# Altium PCB PANEL-PCB-Rectifier.PcbDoc
Units mm, origin at the board's own origin, x right, y up, seen from the top; angles counter-clockwise.
Board outline 300 x 182 mm, 2 copper layers (Top Layer, Bottom Layer), stack 1.569 mm thick; 8 components, 4 nets, 8 pads, 0 vias.
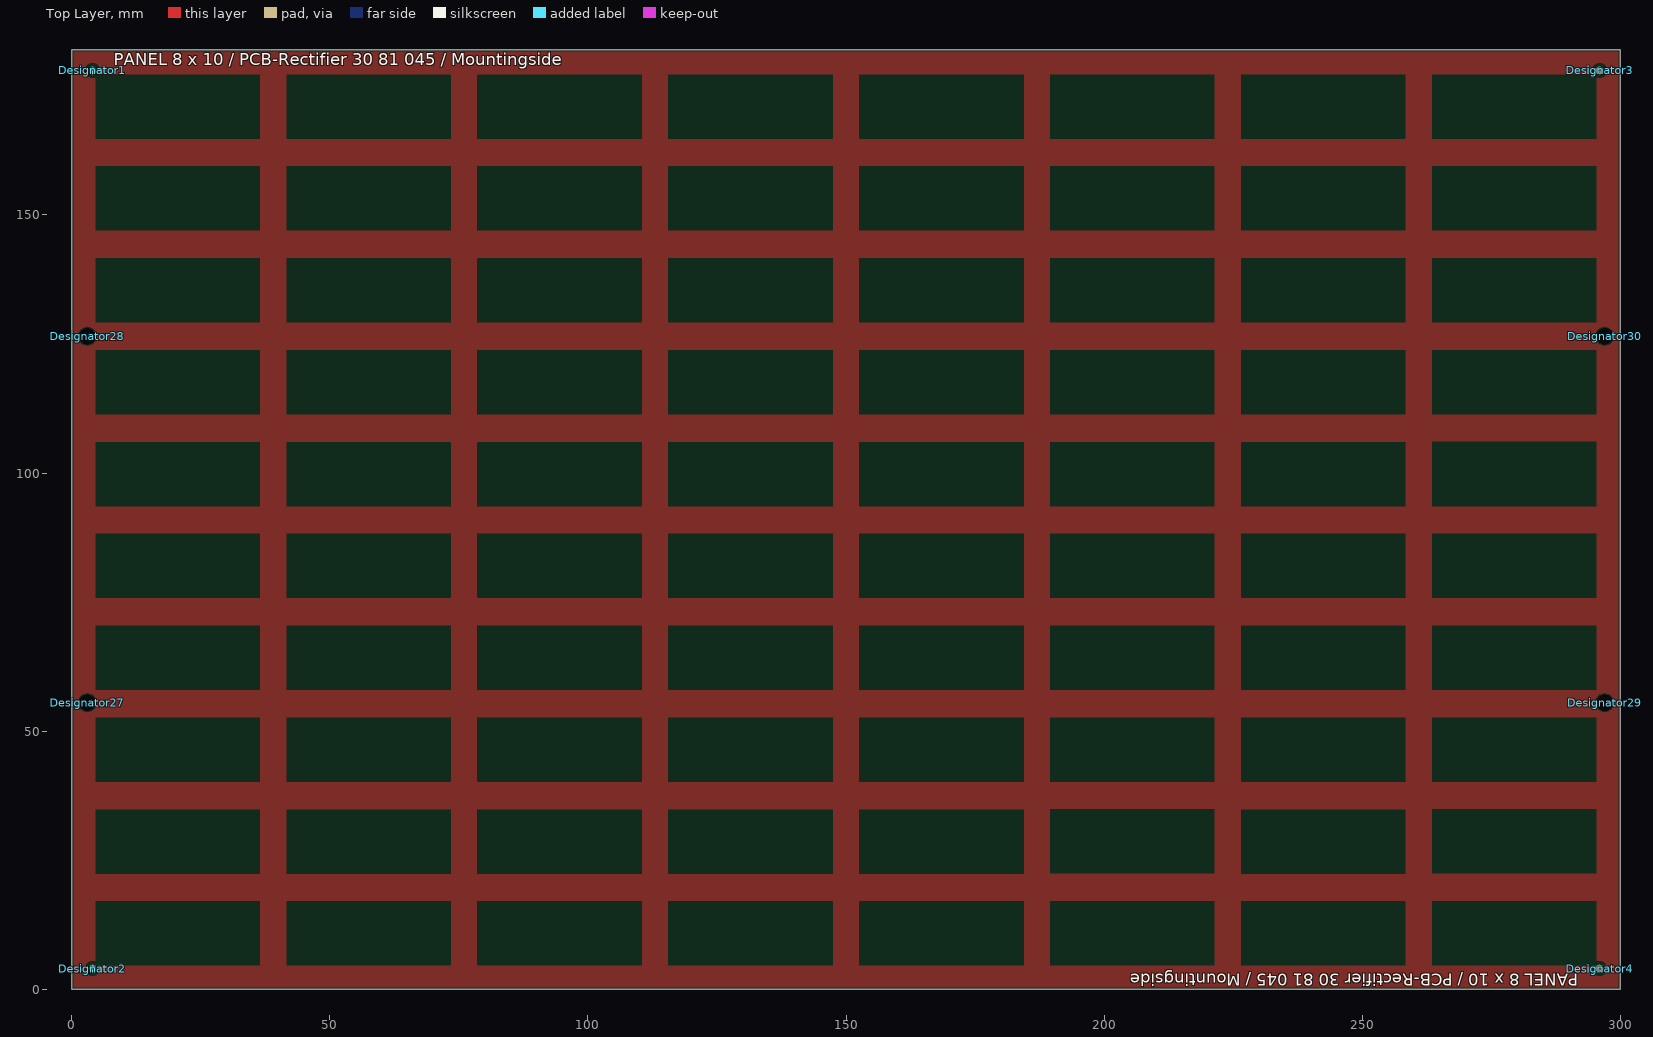
[diagram p0: Top Layer view]
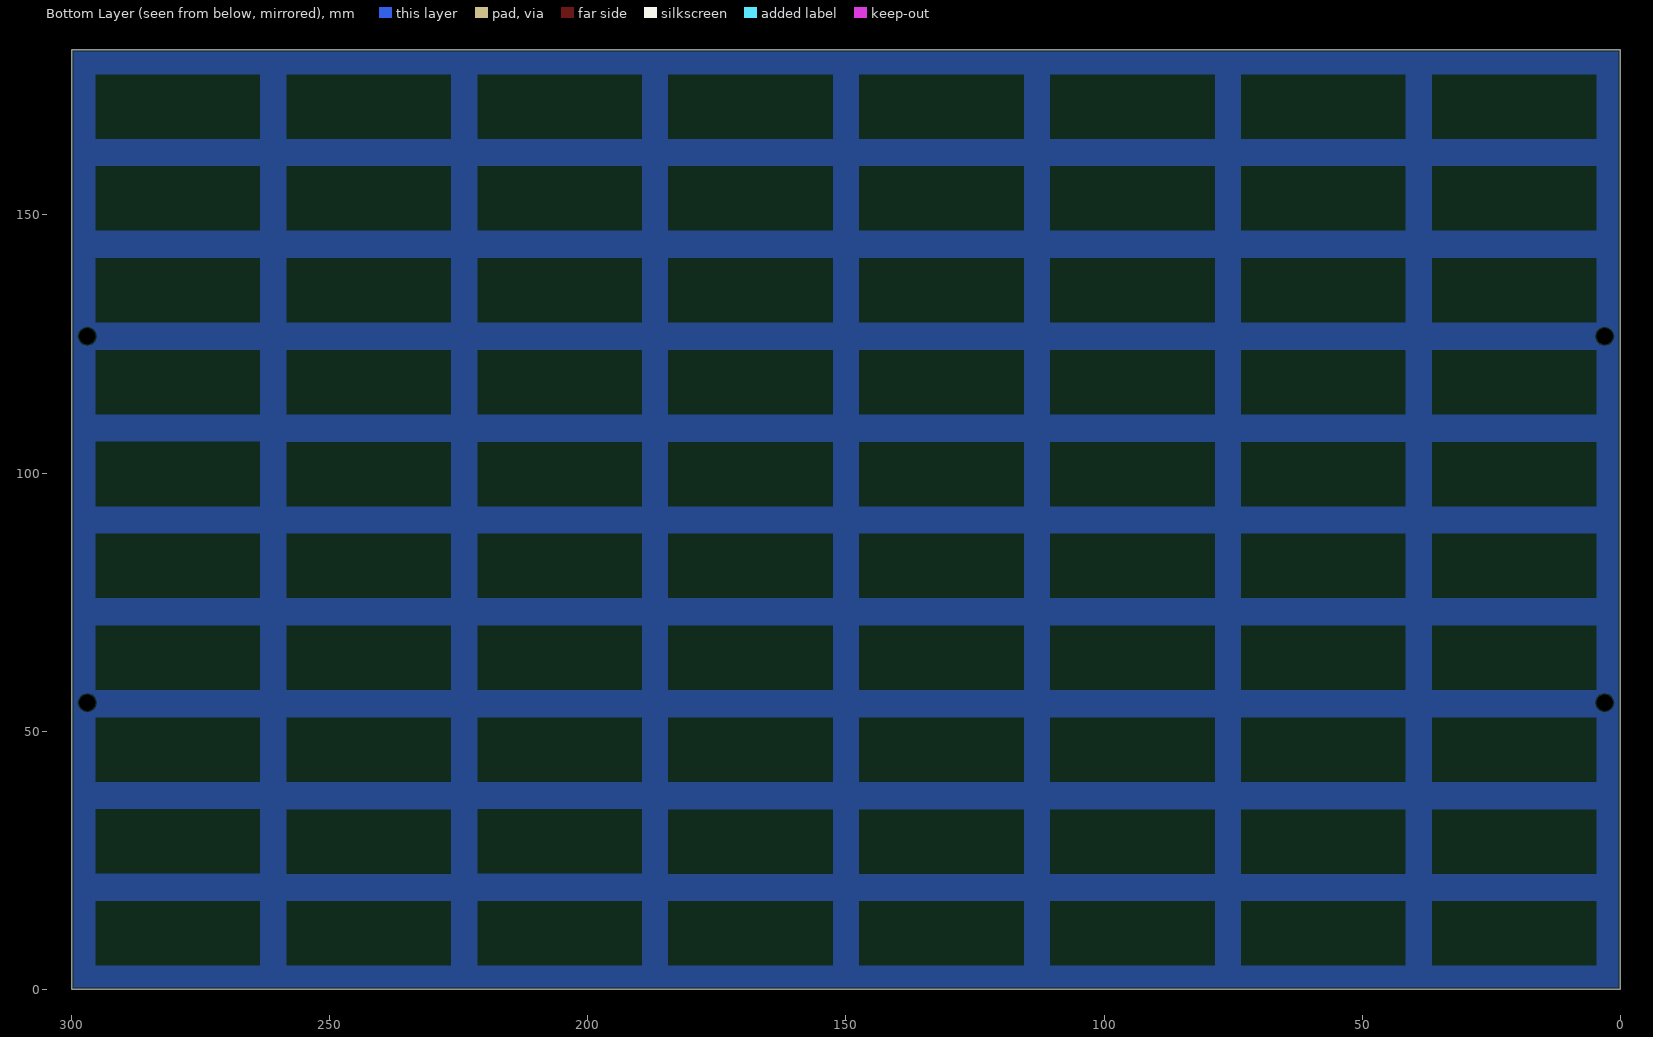
[diagram p1: Bottom Layer view, seen from below]

## Layer stack, top to bottom
Top Solder: solder mask 0.0254, SM-001, Dk 4
Top Layer: signal copper 0.035
Dielectric 1: core 1.4986, Core-043, Dk 4.3
Bottom Layer: signal copper 0.035
Bottom Solder: solder mask 0.0254, SM-001, Dk 4

## Board outline
0,0 0,182 300,182 300,0
cut-out: 6.9,193

## Design rules (kind name [scope] priority, off if disabled: settings)
BoardOutlineClearance [All] p1: gap=0.4 ignorepadtopadclearanceinfootprint=FALSE
Clearance [All] p1: gap=0.2 ignorepadtopadclearanceinfootprint=FALSE except(0: Arc-Hole Track-Hole SMDPad-Hole THPad-Hole Via-Hole Fill-Hole Poly-Hole Region-Hole Text-Hole)
HoleSize [All] p1: absolutevalues=TRUE maxlimit=4 minlimit=0.025 maxpercent=80.000 minpercent=20.000
HoleToHoleClearance [All] p1: gap=0.1 allowstackedmicrovias=TRUE
MinimumSolderMaskSliver [All] p1: minsoldermaskwidth=0.07
PolygonConnect [All] p1: connectstyle=Direct reliefconductorwidth=0.3 reliefentries=4 polygonreliefangle="90 Angle" airgapwidth=0.3
RoutingVias [All] p1: holewidth=0.2 width=0.6 viastyle="Through Hole" minholewidth=0.3 minwidth=0.6 maxholewidth=5 maxwidth=10
SilkToSilkClearance [All] p1: silktosilkclearance=0.1
SilkToSolderMaskClearance [IsPad] p1: minsilkscreentomaskgap=0.1 clearancetoexposedcopper=TRUE
SolderMaskExpansion [All] p1: expansion=0.06 istentingtop=FALSE
Width [All] p1: maxlimit=10 minlimit=0.2 preferedwidth=0.3
25 further rules are at their usual default settings.

## Components (designator, comment, footprint, x,y, rotation, side; value= is the part's Value field where it differs from the comment)
Designator1 "Comment" Fiducial_1 4,178 r0 top
Designator2 "Comment" Fiducial_1 4,4 r0 top
Designator3 "Comment" Fiducial_1 296,178 r0 top
Designator4 "Comment" Fiducial_1 296,4 r0 top
Designator27 "Comment" Mountingholes_M3_NotPlated 3,55.5 r0 top locked
Designator28 "Comment" Mountingholes_M3_NotPlated 3,126.5 r0 top locked
Designator29 "Comment" Mountingholes_M3_NotPlated 297,55.5 r0 top locked
Designator30 "Comment" Mountingholes_M3_NotPlated 297,126.5 r0 top locked

## Footprints (in the part's own frame and the unit in brackets; to place one, negate y for a bottom-side part, rotate by r counter-clockwise, add the part's x,y. Pads: shape width x height; smd on the part's side, far side on the other; paste and mask are expansions set on the pad)
Fiducial_1 [mm] "d=1.5mm"
  round 1.5 smd paste-5 mask+0.75: 2(0,0)
  Top Layer pour cut-out: 1.5,0 1.386,0.574 1.061,1.061 0.574,1.386 0,1.5 0,1.5 -0.574,1.386 -1.061,1.061 -1.386,0.574 -1.5,0 -1.5,0 -1.386,-0.574 -1.061,-1.061 -0.574,-1.386 0,-1.5 0,-1.5 0.574,-1.386 1.061,-1.061 1.386,-0.574 1.5,0
Mountingholes_M3_NotPlated [mm] "M3"
  round 0 hole 3.2 unplated: 1(0,0)

## Nets (pads, with @x,y where several pads share a name; then routed paths per layer and width w, separated by ;. In a path a pad name is that pad's centre, name@x,y a point inside that pad or via, vN(x,y) a via of type N, cw(c..) or ccw(c..) an arc to the next point about the centre after c; other vN are vias at no path point)
NetD1_1: 
NetD1_2: 
NetD2_2: 
NetD3_2: 
pads on no net: Designator1.2 Designator2.2 Designator3.2 Designator4.2 Designator27.1 Designator28.1 Designator29.1 Designator30.1

## Polygon pours and split planes (outlines as drawn)
no net on Top Milling "NONET_L03_P-001" (solid): 12.8,-1.7
no net on Top Milling "NONET_L03_P-001" (solid): 25.875,-3
no net on Top Milling "NONET_L03_P-001" (solid): 14.7,-3
no net on Mechanical 16 "NONET_L03_P-001" (solid): 76.3,22.3
NetD1_1 on Top Layer "NONET_L03_P-001" (solid, pour order 26): 295,0 295,182 300,182 300,0
NetD1_1 on Top Layer "NONET_L03_P-001" (solid, pour order 25): 258,-0.004 258,181.996 264,181.996 264,-0.004
NetD1_1 on Top Layer "NONET_L03_P-001" (solid, pour order 24): 221,-0.004 221,181.996 227,181.996 227,-0.004
NetD1_1 on Top Layer "NONET_L03_P-001" (solid, pour order 23): 184,0 184,182 190,182 190,0
NetD1_1 on Top Layer "NONET_L03_P-001" (solid, pour order 22): 147,0 147,182 153,182 153,0
NetD1_1 on Top Layer "NONET_L03_P-001" (solid, pour order 21): 110,0 110,182 116,182 116,0
NetD1_1 on Top Layer "NONET_L03_P-001" (solid, pour order 20): 73,0 73,182 79,182 79,0
NetD1_1 on Top Layer "NONET_L03_P-001" (solid, pour order 19): 36,0.004 36,182.004 42,182.004 42,0.004
NetD1_1 on Top Layer "NONET_L03_P-001" (solid, pour order 18): 0,0 0,182 5,182 5,0
NetD1_1 on Top Layer "NONET_L03_P-001" (solid, pour order 17): 0,182 300,182 300,176.8 0,176.8
NetD1_1 on Top Layer "NONET_L03_P-001" (solid, pour order 16): 0,165.2 300,165.2 300,159 0,159
NetD1_1 on Top Layer "NONET_L03_P-001" (solid, pour order 15): 0,147.4 300,147.4 300,141.2 0,141.2
NetD1_1 on Top Layer "NONET_L03_P-001" (solid, pour order 14): 0,129.6 300,129.6 300,123.4 0,123.4
NetD1_1 on Top Layer "NONET_L03_P-001" (solid, pour order 13): 0,111.8 300,111.8 300,105.6 0,105.6
NetD1_1 on Top Layer "NONET_L03_P-001" (solid, pour order 12): 0,94 300,94 300,87.8 0,87.8
NetD1_1 on Top Layer "NONET_L03_P-001" (solid, pour order 11): 0,76.2 300,76.2 300,70 0,70
NetD1_1 on Top Layer "NONET_L03_P-001" (solid, pour order 10): 0,58.4 300,58.4 300,52.2 0,52.2
NetD1_1 on Top Layer "NONET_L03_P-001" (solid, pour order 9): 0,40.6 300,40.6 300,34.4 0,34.4
NetD1_1 on Top Layer "NONET_L03_P-001" (solid, pour order 8): 0,22.8 300,22.8 300,16.6 0,16.6
NetD1_1 on Top Layer "NONET_L03_P-001" (solid, pour order 7): 0,5 300,5 300,0 0,0
NetD1_2 on Bottom Layer "NONET_L03_P-001" (solid, pour order 46): 295,0 295,182 300,182 300,0
NetD1_2 on Bottom Layer "NONET_L03_P-001" (solid, pour order 27): 0,5 300,5 300,0 0,0
NetD1_2 on Bottom Layer "NONET_L03_P-001" (solid, pour order 28): 0,22.8 300,22.8 300,16.6 0,16.6
NetD1_2 on Bottom Layer "NONET_L03_P-001" (solid, pour order 29): 0,40.6 300,40.6 300,34.4 0,34.4
NetD1_2 on Bottom Layer "NONET_L03_P-001" (solid, pour order 30): 0,58.4 300,58.4 300,52.2 0,52.2
NetD1_2 on Bottom Layer "NONET_L03_P-001" (solid, pour order 31): 0,76.2 300,76.2 300,70 0,70
NetD1_2 on Bottom Layer "NONET_L03_P-001" (solid, pour order 32): 0,94 300,94 300,87.8 0,87.8
NetD1_2 on Bottom Layer "NONET_L03_P-001" (solid, pour order 33): 0,111.8 300,111.8 300,105.6 0,105.6
NetD1_2 on Bottom Layer "NONET_L03_P-001" (solid, pour order 34): 0,129.6 300,129.6 300,123.4 0,123.4
NetD1_2 on Bottom Layer "NONET_L03_P-001" (solid, pour order 35): 0,147.4 300,147.4 300,141.2 0,141.2
NetD1_2 on Bottom Layer "NONET_L03_P-001" (solid, pour order 36): 0,165.2 300,165.2 300,159 0,159
NetD1_2 on Bottom Layer "NONET_L03_P-001" (solid, pour order 37): 0,182 300,182 300,176.8 0,176.8
NetD1_2 on Bottom Layer "NONET_L03_P-001" (solid, pour order 38): 0,0 0,182 5,182 5,0
NetD1_2 on Bottom Layer "NONET_L03_P-001" (solid, pour order 39): 36,0.004 36,182.004 42,182.004 42,0.004
NetD1_2 on Bottom Layer "NONET_L03_P-001" (solid, pour order 40): 73,0 73,182 79,182 79,0
NetD1_2 on Bottom Layer "NONET_L03_P-001" (solid, pour order 41): 110,0 110,182 116,182 116,0
NetD1_2 on Bottom Layer "NONET_L03_P-001" (solid, pour order 42): 147,0 147,182 153,182 153,0
NetD1_2 on Bottom Layer "NONET_L03_P-001" (solid, pour order 43): 184,0 184,182 190,182 190,0
NetD1_2 on Bottom Layer "NONET_L03_P-001" (solid, pour order 44): 221,-0.004 221,181.996 227,181.996 227,-0.004
NetD1_2 on Bottom Layer "NONET_L03_P-001" (solid, pour order 45): 258,-0.004 258,181.996 264,181.996 264,-0.004

## Other copper
Top Layer:
  pour cut-out: 78.5,88.3 78.5,75.7 110.5,75.7 110.5,88.3
  pour cut-out: 78.5,123.9 78.5,111.3 110.5,111.3 110.5,123.9
  pour cut-out: 78.5,17.1 78.5,4.5 110.5,4.5 110.5,17.1
  pour cut-out: 78.5,52.7 78.5,40.1 110.5,40.1 110.5,52.7
  pour cut-out: 78.5,159.5 78.5,146.9 110.5,146.9 110.5,159.5
  pour cut-out: 78.5,177.3 78.5,164.7 110.5,164.7 110.5,177.3
  pour cut-out: 78.5,141.7 78.5,129.1 110.5,129.1 110.5,141.7
  pour cut-out: 78.5,106.1 78.5,93.5 110.5,93.5 110.5,106.1
  pour cut-out: 78.5,70.5 78.5,57.9 110.5,57.9 110.5,70.5
  pour cut-out: 78.501,34.904 78.501,22.304 110.501,22.304 110.501,34.904
  pour cut-out: 226.5,88.3 226.5,75.7 258.5,75.7 258.5,88.3
  pour cut-out: 226.5,123.9 226.5,111.3 258.5,111.3 258.5,123.9
  pour cut-out: 263.5,88.314 263.5,75.714 295.5,75.714 295.5,88.314
  pour cut-out: 263.5,123.914 263.5,111.314 295.5,111.314 295.5,123.914
  pour cut-out: 226.5,17.1 226.5,4.5 258.5,4.5 258.5,17.1
  pour cut-out: 226.5,52.7 226.5,40.1 258.5,40.1 258.5,52.7
  pour cut-out: 263.5,17.114 263.5,4.514 295.5,4.514 295.5,17.114
  pour cut-out: 263.5,52.714 263.5,40.114 295.5,40.114 295.5,52.714
  pour cut-out: 115.5,88.3 115.5,75.7 147.5,75.7 147.5,88.3
  pour cut-out: 115.5,123.9 115.5,111.3 147.5,111.3 147.5,123.9
  pour cut-out: 152.5,88.3 152.5,75.7 184.5,75.7 184.5,88.3
  pour cut-out: 152.5,123.9 152.5,111.3 184.5,111.3 184.5,123.9
  pour cut-out: 189.492,88.31 189.492,75.71 221.492,75.71 221.492,88.31
  pour cut-out: 189.492,123.91 189.492,111.31 221.492,111.31 221.492,123.91
  pour cut-out: 115.5,17.1 115.5,4.5 147.5,4.5 147.5,17.1
  pour cut-out: 115.5,52.7 115.5,40.1 147.5,40.1 147.5,52.7
  pour cut-out: 152.5,17.1 152.5,4.5 184.5,4.5 184.5,17.1
  pour cut-out: 152.5,52.7 152.5,40.1 184.5,40.1 184.5,52.7
  pour cut-out: 189.492,17.11 189.492,4.51 221.492,4.51 221.492,17.11
  pour cut-out: 189.492,52.71 189.492,40.11 221.492,40.11 221.492,52.71
  pour cut-out: 4.5,123.9 4.5,111.3 36.5,111.3 36.5,123.9
  pour cut-out: 4.5,88.3 4.5,75.7 36.5,75.7 36.5,88.3
  pour cut-out: 41.5,88.3 41.5,75.7 73.5,75.7 73.5,88.3
  pour cut-out: 41.5,123.9 41.5,111.3 73.5,111.3 73.5,123.9
  pour cut-out: 4.5,52.7 4.5,40.1 36.5,40.1 36.5,52.7
  pour cut-out: 4.5,17.1 4.5,4.5 36.5,4.5 36.5,17.1
  pour cut-out: 41.5,17.1 41.5,4.5 73.5,4.5 73.5,17.1
  pour cut-out: 41.5,52.7 41.5,40.1 73.5,40.1 73.5,52.7
  pour cut-out: 226.5,159.5 226.5,146.9 258.5,146.9 258.5,159.5
  pour cut-out: 226.5,177.3 226.5,164.7 258.5,164.7 258.5,177.3
  pour cut-out: 263.5,159.514 263.5,146.914 295.5,146.914 295.5,159.514
  pour cut-out: 263.5,177.314 263.5,164.714 295.5,164.714 295.5,177.314
  pour cut-out: 226.5,141.7 226.5,129.1 258.5,129.1 258.5,141.7
  pour cut-out: 263.5,141.714 263.5,129.114 295.5,129.114 295.5,141.714
  pour cut-out: 226.5,106.1 226.5,93.5 258.5,93.5 258.5,106.1
  pour cut-out: 263.5,106.114 263.5,93.514 295.5,93.514 295.5,106.114
  pour cut-out: 226.5,70.5 226.5,57.9 258.5,57.9 258.5,70.5
  pour cut-out: 263.5,70.514 263.5,57.914 295.5,57.914 295.5,70.514
  pour cut-out: 226.501,34.904 226.501,22.304 258.501,22.304 258.501,34.904
  pour cut-out: 263.501,34.918 263.501,22.318 295.501,22.318 295.501,34.918
  pour cut-out: 115.5,159.5 115.5,146.9 147.5,146.9 147.5,159.5
  pour cut-out: 115.5,177.3 115.5,164.7 147.5,164.7 147.5,177.3
  pour cut-out: 152.5,159.5 152.5,146.9 184.5,146.9 184.5,159.5
  pour cut-out: 152.5,177.3 152.5,164.7 184.5,164.7 184.5,177.3
  pour cut-out: 189.492,159.51 189.492,146.91 221.492,146.91 221.492,159.51
  pour cut-out: 189.492,177.31 189.492,164.71 221.492,164.71 221.492,177.31
  pour cut-out: 115.5,141.7 115.5,129.1 147.5,129.1 147.5,141.7
  pour cut-out: 152.5,141.7 152.5,129.1 184.5,129.1 184.5,141.7
  pour cut-out: 189.492,141.71 189.492,129.11 221.492,129.11 221.492,141.71
  pour cut-out: 115.5,106.1 115.5,93.5 147.5,93.5 147.5,106.1
  pour cut-out: 152.5,106.1 152.5,93.5 184.5,93.5 184.5,106.1
  pour cut-out: 189.492,106.11 189.492,93.51 221.492,93.51 221.492,106.11
  pour cut-out: 115.5,70.5 115.5,57.9 147.5,57.9 147.5,70.5
  pour cut-out: 152.5,70.5 152.5,57.9 184.5,57.9 184.5,70.5
  pour cut-out: 189.492,70.51 189.492,57.91 221.492,57.91 221.492,70.51
  pour cut-out: 115.501,34.904 115.501,22.304 147.501,22.304 147.501,34.904
  pour cut-out: 152.501,34.904 152.501,22.304 184.501,22.304 184.501,34.904
  pour cut-out: 189.493,34.913 189.493,22.313 221.493,22.313 221.493,34.913
  pour cut-out: 4.5,177.3 4.5,164.7 36.5,164.7 36.5,177.3
  pour cut-out: 4.5,159.5 4.5,146.9 36.5,146.9 36.5,159.5
  pour cut-out: 41.5,159.5 41.5,146.9 73.5,146.9 73.5,159.5
  pour cut-out: 41.5,177.3 41.5,164.7 73.5,164.7 73.5,177.3
  pour cut-out: 4.5,141.7 4.5,129.1 36.5,129.1 36.5,141.7
  pour cut-out: 41.5,141.7 41.5,129.1 73.5,129.1 73.5,141.7
  pour cut-out: 4.5,106.1 4.5,93.5 36.5,93.5 36.5,106.1
  pour cut-out: 41.5,106.1 41.5,93.5 73.5,93.5 73.5,106.1
  pour cut-out: 4.5,70.5 4.5,57.9 36.5,57.9 36.5,70.5
  pour cut-out: 41.5,70.5 41.5,57.9 73.5,57.9 73.5,70.5
  pour cut-out: 4.501,34.904 4.501,22.304 36.501,22.304 36.501,34.904
  pour cut-out: 41.501,34.904 41.501,22.304 73.501,22.304 73.501,34.904
  pour cut-out: 7.875,174.389 7.418,174.389 7.418,174.125 7.375,174.125 7.375,174.425 7.875,174.425
Bottom Layer:
  pour cut-out: 7.875,174.389 7.418,174.389 7.418,174.125 7.375,174.125 7.375,174.425 7.875,174.425
  pour cut-out: 263.5,177.314 263.5,164.714 295.5,164.714 295.5,177.314
  pour cut-out: 263.5,159.514 263.5,146.914 295.5,146.914 295.5,159.514
  pour cut-out: 263.5,141.714 263.5,129.114 295.5,129.114 295.5,141.714
  pour cut-out: 263.5,123.914 263.5,111.314 295.5,111.314 295.5,123.914
  pour cut-out: 263.5,106.114 263.5,93.514 295.5,93.514 295.5,106.114
  pour cut-out: 263.5,88.314 263.5,75.714 295.5,75.714 295.5,88.314
  pour cut-out: 263.5,70.514 263.5,57.914 295.5,57.914 295.5,70.514
  pour cut-out: 263.5,52.714 263.5,40.114 295.5,40.114 295.5,52.714
  pour cut-out: 263.501,34.918 263.501,22.318 295.501,22.318 295.501,34.918
  pour cut-out: 263.5,17.114 263.5,4.514 295.5,4.514 295.5,17.114
  pour cut-out: 226.5,177.3 226.5,164.7 258.5,164.7 258.5,177.3
  pour cut-out: 226.5,159.5 226.5,146.9 258.5,146.9 258.5,159.5
  pour cut-out: 226.5,141.7 226.5,129.1 258.5,129.1 258.5,141.7
  pour cut-out: 226.5,123.9 226.5,111.3 258.5,111.3 258.5,123.9
  pour cut-out: 226.5,106.1 226.5,93.5 258.5,93.5 258.5,106.1
  pour cut-out: 226.5,88.3 226.5,75.7 258.5,75.7 258.5,88.3
  pour cut-out: 226.5,70.5 226.5,57.9 258.5,57.9 258.5,70.5
  pour cut-out: 226.5,52.7 226.5,40.1 258.5,40.1 258.5,52.7
  pour cut-out: 226.501,34.904 226.501,22.304 258.501,22.304 258.501,34.904
  pour cut-out: 226.5,17.1 226.5,4.5 258.5,4.5 258.5,17.1
  pour cut-out: 189.492,177.31 189.492,164.71 221.492,164.71 221.492,177.31
  pour cut-out: 189.492,159.51 189.492,146.91 221.492,146.91 221.492,159.51
  pour cut-out: 189.492,141.71 189.492,129.11 221.492,129.11 221.492,141.71
  pour cut-out: 189.492,123.91 189.492,111.31 221.492,111.31 221.492,123.91
  pour cut-out: 189.492,106.11 189.492,93.51 221.492,93.51 221.492,106.11
  pour cut-out: 189.492,88.31 189.492,75.71 221.492,75.71 221.492,88.31
  pour cut-out: 189.492,70.51 189.492,57.91 221.492,57.91 221.492,70.51
  pour cut-out: 189.492,52.71 189.492,40.11 221.492,40.11 221.492,52.71
  pour cut-out: 189.493,34.913 189.493,22.313 221.493,22.313 221.493,34.913
  pour cut-out: 189.492,17.11 189.492,4.51 221.492,4.51 221.492,17.11
  pour cut-out: 152.5,177.3 152.5,164.7 184.5,164.7 184.5,177.3
  pour cut-out: 152.5,159.5 152.5,146.9 184.5,146.9 184.5,159.5
  pour cut-out: 152.5,141.7 152.5,129.1 184.5,129.1 184.5,141.7
  pour cut-out: 152.5,123.9 152.5,111.3 184.5,111.3 184.5,123.9
  pour cut-out: 152.5,106.1 152.5,93.5 184.5,93.5 184.5,106.1
  pour cut-out: 152.5,88.3 152.5,75.7 184.5,75.7 184.5,88.3
  pour cut-out: 152.5,70.5 152.5,57.9 184.5,57.9 184.5,70.5
  pour cut-out: 152.5,52.7 152.5,40.1 184.5,40.1 184.5,52.7
  pour cut-out: 152.501,34.904 152.501,22.304 184.501,22.304 184.501,34.904
  pour cut-out: 152.5,17.1 152.5,4.5 184.5,4.5 184.5,17.1
  pour cut-out: 115.5,177.3 115.5,164.7 147.5,164.7 147.5,177.3
  pour cut-out: 115.5,159.5 115.5,146.9 147.5,146.9 147.5,159.5
  pour cut-out: 115.5,141.7 115.5,129.1 147.5,129.1 147.5,141.7
  pour cut-out: 115.5,123.9 115.5,111.3 147.5,111.3 147.5,123.9
  pour cut-out: 115.5,106.1 115.5,93.5 147.5,93.5 147.5,106.1
  pour cut-out: 115.5,88.3 115.5,75.7 147.5,75.7 147.5,88.3
  pour cut-out: 115.5,70.5 115.5,57.9 147.5,57.9 147.5,70.5
  pour cut-out: 115.5,52.7 115.5,40.1 147.5,40.1 147.5,52.7
  pour cut-out: 115.501,34.904 115.501,22.304 147.501,22.304 147.501,34.904
  pour cut-out: 115.5,17.1 115.5,4.5 147.5,4.5 147.5,17.1
  pour cut-out: 78.5,177.3 78.5,164.7 110.5,164.7 110.5,177.3
  pour cut-out: 78.5,159.5 78.5,146.9 110.5,146.9 110.5,159.5
  pour cut-out: 78.5,141.7 78.5,129.1 110.5,129.1 110.5,141.7
  pour cut-out: 78.5,123.9 78.5,111.3 110.5,111.3 110.5,123.9
  pour cut-out: 78.5,106.1 78.5,93.5 110.5,93.5 110.5,106.1
  pour cut-out: 78.5,88.3 78.5,75.7 110.5,75.7 110.5,88.3
  pour cut-out: 78.5,70.5 78.5,57.9 110.5,57.9 110.5,70.5
  pour cut-out: 78.5,52.7 78.5,40.1 110.5,40.1 110.5,52.7
  pour cut-out: 78.501,34.904 78.501,22.304 110.501,22.304 110.501,34.904
  pour cut-out: 78.5,17.1 78.5,4.5 110.5,4.5 110.5,17.1
  pour cut-out: 41.5,177.3 41.5,164.7 73.5,164.7 73.5,177.3
  pour cut-out: 41.5,159.5 41.5,146.9 73.5,146.9 73.5,159.5
  pour cut-out: 41.5,141.7 41.5,129.1 73.5,129.1 73.5,141.7
  pour cut-out: 41.5,123.9 41.5,111.3 73.5,111.3 73.5,123.9
  pour cut-out: 41.5,106.1 41.5,93.5 73.5,93.5 73.5,106.1
  pour cut-out: 41.5,88.3 41.5,75.7 73.5,75.7 73.5,88.3
  pour cut-out: 41.5,70.5 41.5,57.9 73.5,57.9 73.5,70.5
  pour cut-out: 41.5,52.7 41.5,40.1 73.5,40.1 73.5,52.7
  pour cut-out: 41.501,34.904 41.501,22.304 73.501,22.304 73.501,34.904
  pour cut-out: 41.5,17.1 41.5,4.5 73.5,4.5 73.5,17.1
  pour cut-out: 4.5,17.1 4.5,4.5 36.5,4.5 36.5,17.1
  pour cut-out: 4.501,34.904 4.501,22.304 36.501,22.304 36.501,34.904
  pour cut-out: 4.5,52.7 4.5,40.1 36.5,40.1 36.5,52.7
  pour cut-out: 4.5,70.5 4.5,57.9 36.5,57.9 36.5,70.5
  pour cut-out: 4.5,88.3 4.5,75.7 36.5,75.7 36.5,88.3
  pour cut-out: 4.5,106.1 4.5,93.5 36.5,93.5 36.5,106.1
  pour cut-out: 4.5,123.9 4.5,111.3 36.5,111.3 36.5,123.9
  pour cut-out: 4.5,141.7 4.5,129.1 36.5,129.1 36.5,141.7
  pour cut-out: 4.5,159.5 4.5,146.9 36.5,146.9 36.5,159.5
  pour cut-out: 4.5,177.3 4.5,164.7 36.5,164.7 36.5,177.3

## Silkscreen, mask and mechanical layers (free items; w line width, h text height)
Top Overlay:
  text "PANEL 8 x 10 / PCB-Rectifier 30 81 045 / Mountingside" at 8.145,178.267 h4
  text "PANEL 8 x 10 / PCB-Rectifier 30 81 045 / Mountingside" at 291.855,3.733 h4 r180
Route Tool Path:
  drawing of 1120 lines, arcs and shapes, not listed
Mechanical 16:
  drawing of 201 lines, arcs and shapes, not listed
  text "[Gerber] .variantname  / .gbr                Top Layer                                                  / .gbr                Bottom Layer                          / .gbr                Bottom Pad Master                        / .gbr                Top Pad Master                           / .gbr                Bottom Overlay                           / .gbr                Bottom Solder                            / .gbr                Bottom Paste                             / .gbr                Top Overlay                              / .gbr                Top Paste                                / .gbr                Top Solder                               / .gbr                X / .gbr                X / .gbr                X / .gbr                Mechanical 16, Placement Logo, Stackup, PCB-Specifikation, Contact to Engineer   / .gbr                Mechanical 9, Milling or Route Tool Path / .gbr                Profile = Board Outline                                 / .gbr                Non-plated through-hole drill file       / .gbr                Plated through-hole drill file           / .gbr                Drill Drawing                            / .gbr                Drill Guide" at 327,140 h1.52
  text "[PCB - Specifikation] / 1. PCB Size 182mm x 300mm, FR4 / 2. X         / 3. Finished Thickness to be [1.6 +/-10%] mm  / 4. Board Finish: Immersion Gold (ENIG) / 5. Soldermask - green, Top & Bottom / 6. Silkscreen TOP and Bottom, white / 7. X / 8. Layer = 2 Cu / 35um / 9. X / 10. X / 11. X / 12. X" at 328,100 h1.52
  text "Layer" at 329.485,79.954 h1.52
  text "Name" at 339.896,79.954 h1.52
  text "Material" at 363.512,79.954 h1.52
  text "Thickness" at 378.748,79.954 h1.52
  text "Constant" at 395.254,79.954 h1.52
  text "Board Layer Stack" at 409.728,79.954 h1.52
  text "Top Overlay" at 339.896,76.906 h1.52
  text "Top Solder" at 339.896,73.858 h1.52
  text "SM-001" at 363.512,73.858 h1.52
  text "0,025mm" at 378.748,73.858 h1.52
  text "4" at 395.254,73.858 h1.52
  text "1" at 329.485,70.81 h1.52
  text "Top Layer" at 339.896,70.81 h1.52
  text "Copper" at 363.512,70.81 h1.52
  text "0,035mm" at 378.748,70.81 h1.52
  text "Dielectric 1" at 339.896,67.762 h1.52
  text "Core-043" at 363.512,67.762 h1.52
  text "1,499mm" at 378.748,67.762 h1.52
  text "4,3" at 395.254,67.762 h1.52
  text "2" at 329.485,64.714 h1.52
  text "Bottom Layer" at 339.896,64.714 h1.52
  text "Copper" at 363.512,64.714 h1.52
  text "0,035mm" at 378.748,64.714 h1.52
  text "Bottom Solder" at 339.896,61.666 h1.52
  text "SM-001" at 363.512,61.666 h1.52
  text "0,025mm" at 378.748,61.666 h1.52
  text "4" at 395.254,61.666 h1.52
  text "Bottom Overlay" at 339.896,58.618 h1.52
  text "TDX Boards" at 331.9,10.65 h1.52
  text "PANEL-PCB-Rectifier 8 x 10" at 371.854,10.554 h1.52
  text "Variant Name:" at 352.204,10.504 h1.52
  text "Copyright:" at 332.15,6.65 h1.52
  text "Sykam GmbH, Gewerbering 15, D-86922 Eresing" at 347.4,6.65 h1.52
  text "Contact: stephan.diel@sykam.com +49-(0)-8193-938 19" at 332.15,2.65 h1.52

## Dimensions
300,0 to 0,0 on Mechanical 16
300,182 to 300,0 on Mechanical 16

## Panel: embedded boards
"PCB-Rectifier.PcbDoc" at 7.01,7, 10 rows x 8 columns, spacing 17.8 x 37, rotation 0